# Altium PCB WCHA_PCB.PcbDoc
Units mm, origin at the board's own origin, x right, y up, seen from the top; angles counter-clockwise.
Board outline 169.67 x 124.71 mm, 2 copper layers (Top Layer, Bottom Layer); 50 components, 43 nets, 186 pads, 1 vias.
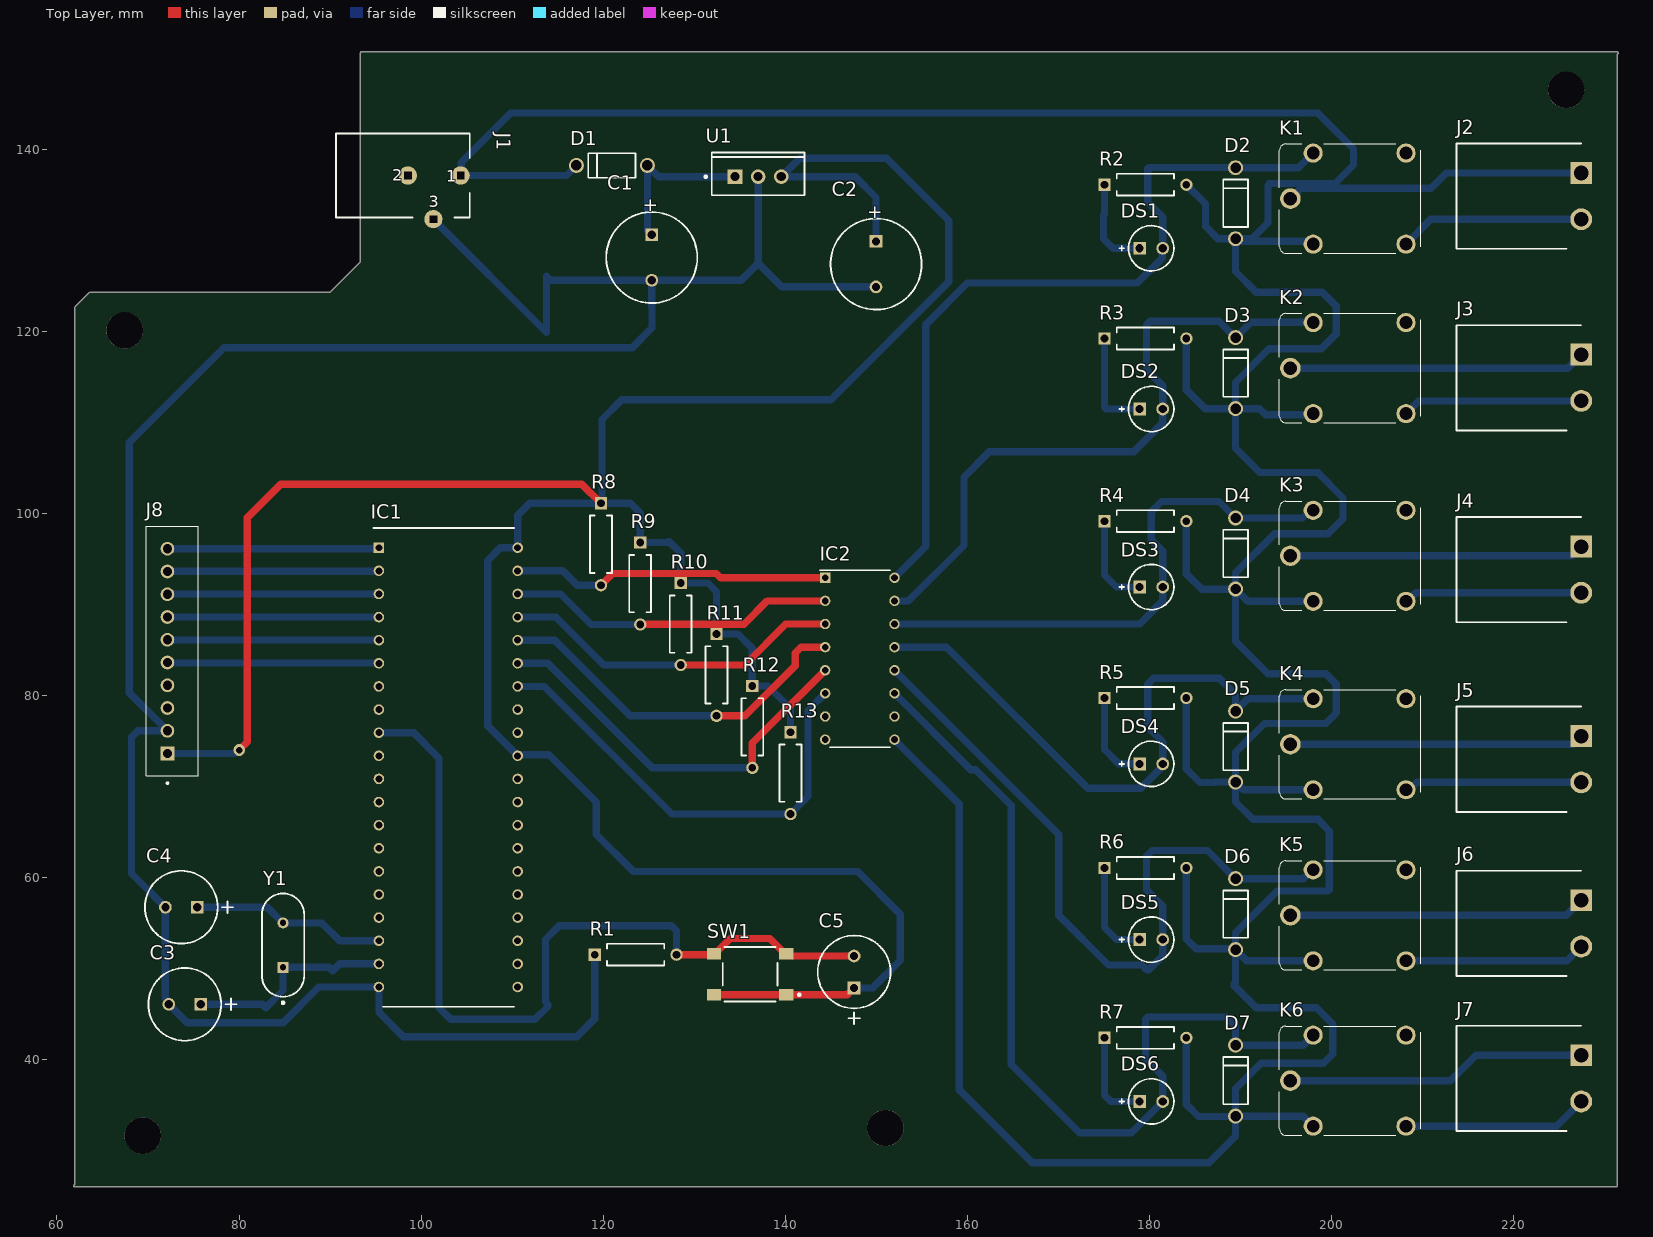
[diagram p0: Top Layer view]
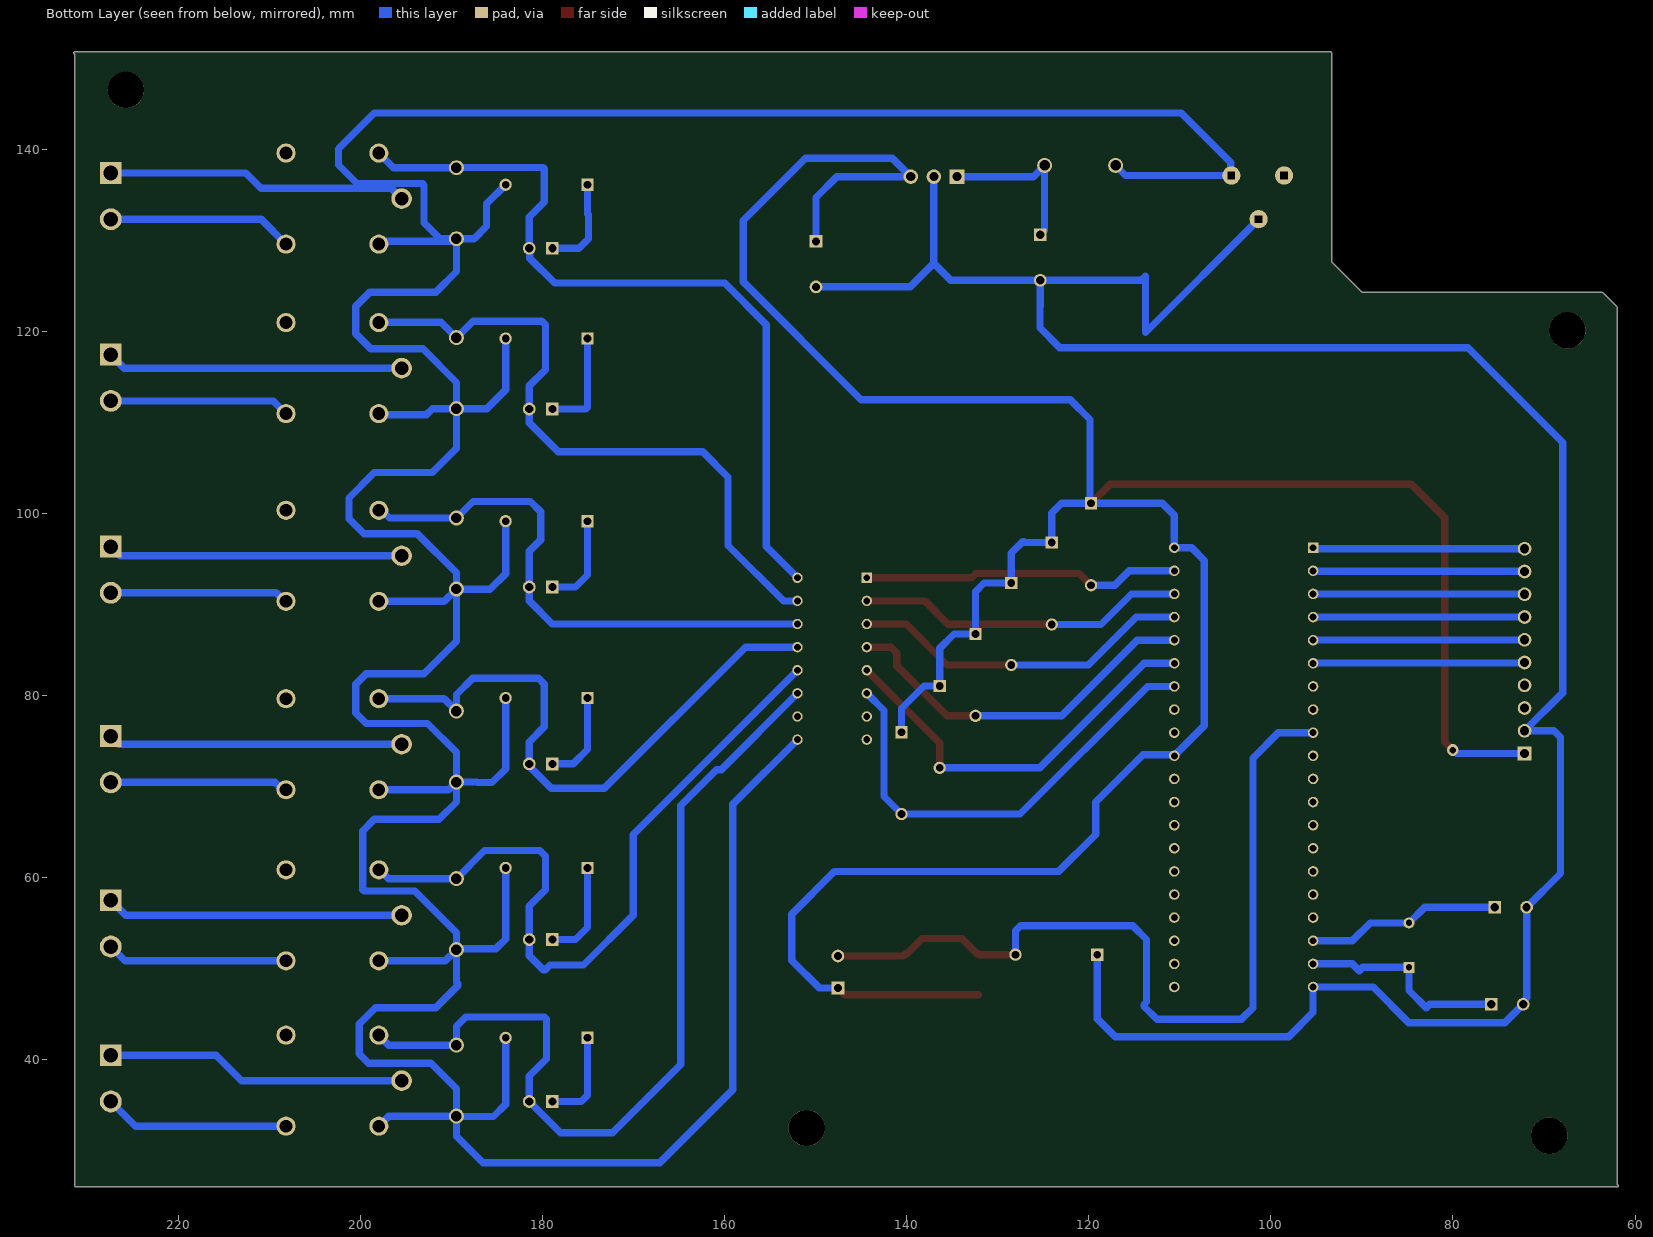
[diagram p1: Bottom Layer view, seen from below]

## Layer stack, top to bottom
Top Solder: solder mask 0.0102, Solder Resist, Dk 3.5
Top Layer: signal copper 0.0356
Dielectric 1: dielectric 0.32, FR-4, Dk 4.8
Bottom Layer: signal copper 0.0356
Bottom Solder: solder mask 0.0102, Solder Resist, Dk 3.5

## Board outline
61.976,26.289 61.976,122.682 62.013,122.772 63.537,124.296 63.627,124.333 89.99,124.333 93.345,127.688 93.345,150.622 cw(c93.472,150.622) 93.474,150.749 231.394,150.749 cw(c231.394,150.622) 231.521,150.622 cw(c231.394,150.622) 231.394,150.495 231.394,26.162 cw(c231.267,26.162) 231.267,26.035 61.976,26.035 cw(c61.976,26.162)

## Design rules (kind name [scope] priority, off if disabled: settings)
Clearance Clearance_1 [All] p1 off: gap=0.254 ignorepadtopadclearanceinfootprint=FALSE
Clearance [All] p2: gap=0.25 ignorepadtopadclearanceinfootprint=TRUE
PolygonConnect [All] p1: connectstyle=Relief reliefconductorwidth=0.254 reliefentries=4 polygonreliefangle="90 Angle" airgapwidth=0.254
RoutingVias [All] p1: holewidth=0.711 width=1.27 viastyle="Through Hole" minholewidth=0.711 minwidth=1.27 maxholewidth=0.711 maxwidth=1.27
SolderMaskExpansion [All] p1: expansion=0.102 istentingtop=FALSE
Width [All] p1: maxlimit=1.2 minlimit=0.254 preferedwidth=0.254 minimp=50.000000 maximp=50.000000 favimp=50.000000
30 further rules are at their usual default settings.

## Components (designator, comment, footprint, x,y, rotation, side; value= is the part's Value field where it differs from the comment)
C1 "ECA1EM102" CAPPR65-500-2000X1000X2200 125.349,128.143 r270 top value=100uF
C2 "ECA1EM102" CAPPR65-500-2000X1000X2200 149.987,127.421 r270 top value=100uF
C3 "ECA1HM101" CAPPR65-350-1150X800X1250 74.041,46.101 r180 top value=33pF
C4 "ECA1HM101" CAPPR65-350-1150X800X1250 73.66,56.769 r180 top value=33pF
C5 "ECA1HM101" CAPPR65-350-1150X800X1250 147.574,49.657 r90 top value=100µF
D1 "1N4007" FAIR-DO-41-2 120.967,138.259 r180 top
D2 "1N4007" FAIR-DO-41-2 189.484,134.112 r90 top
D3 "1N4007" FAIR-DO-41-2 189.484,115.443 r90 top
D4 "1N4007" FAIR-DO-41-2 189.484,95.631 r90 top
D5 "1N4007" FAIR-DO-41-2 189.484,74.422 r90 top
D6 "1N4007" FAIR-DO-41-2 189.484,56.007 r90 top
D7 "1N4007" FAIR-DO-41-2 189.484,37.719 r90 top
DS1 "LTL-1CHYE" LTST-LTL-1CHYE 180.213,129.159 r0 top
DS2 "LTL-1CHYE" LTST-LTL-1CHYE 180.213,111.506 r0 top
DS3 "LTL-1CHYE" LTST-LTL-1CHYE 180.213,91.948 r0 top
DS4 "LTL-1CHYE" LTST-LTL-1CHYE 180.213,72.517 r0 top
DS5 "LTL-1CHYE" LTST-LTL-1CHYE 180.213,53.213 r0 top
DS6 "LTL-1CHYE" LTST-LTL-1CHYE 180.213,35.433 r0 top
IC1 "AT89C51-12PC" DIP1525W56P254L5220H559Q40N 102.994,72.136 r0 top
IC2 "ULN2003A" DIP762W54P254L1918H445Q16N 148.209,84.074 r0 top
J1 "694106301002" 694106301002 98.552,137.16 r0 top
J2 "2EDGRC-5.08-02P-14-00A_H_" SHDRRA2W100P0X508_1X2_1156X1210X780P 227.457,137.432 r90 top
J3 "2EDGRC-5.08-02P-14-00A_H_" SHDRRA2W100P0X508_1X2_1156X1210X780P 227.457,117.475 r90 top
J4 "2EDGRC-5.08-02P-14-00A_H_" SHDRRA2W100P0X508_1X2_1156X1210X780P 227.457,96.393 r90 top
J5 "2EDGRC-5.08-02P-14-00A_H_" SHDRRA2W100P0X508_1X2_1156X1210X780P 227.457,75.565 r90 top
J6 "2EDGRC-5.08-02P-14-00A_H_" SHDRRA2W100P0X508_1X2_1156X1210X780P 227.457,57.531 r90 top
J7 "2EDGRC-5.08-02P-14-00A_H_" SHDRRA2W100P0X508_1X2_1156X1210X780P 227.457,40.513 r90 top
J8 "B10B-XH-A(LF)(SN)" JST_B10B-XH-A(LF)(SN) 72.661,84.903 r270 top
K1 "JJM1-12V" RELAY_JJM1-12V 202.057,134.62 r180 top
K2 "JJM1-12V" RELAY_JJM1-12V 202.057,115.998 r180 top
K3 "JJM1-12V" RELAY_JJM1-12V 202.057,95.377 r180 top
K4 "JJM1-12V" RELAY_JJM1-12V 202.057,74.676 r180 top
K5 "JJM1-12V" RELAY_JJM1-12V 202.057,55.88 r180 top
K6 "JJM1-12V" RELAY_JJM1-12V 202.057,37.719 r180 top
R1 "MFR-25FBF52-47K5" RESA60-630X240 123.571,51.562 r0 top value=8.2k
R2 "MFR-25FBF52-47K5" RESA60-630X240 179.578,136.144 r0 top value=8.2k
R3 "MFR-25FBF52-47K5" RESA60-630X240 179.578,119.253 r0 top value=8.2k
R4 "MFR-25FBF52-47K5" RESA60-630X240 179.578,99.187 r0 top value=8.2k
R5 "MFR-25FBF52-47K5" RESA60-630X240 179.578,79.756 r0 top value=8.2k
R6 "MFR-25FBF52-47K5" RESA60-630X240 179.578,61.087 r0 top value=8.2k
R7 "MFR-25FBF52-47K5" RESA60-630X240 179.578,42.418 r0 top value=8.2k
R8 "MFR-25FBF52-47K5" RESA60-630X240 119.761,96.647 r270 top value=1k
R9 "MFR-25FBF52-47K5" RESA60-630X240 124.079,92.329 r270 top value=1k
R10 "MFR-25FBF52-47K5" RESA60-630X240 128.524,87.884 r270 top value=1k
R11 "MFR-25FBF52-47K5" RESA60-630X240 132.461,82.296 r270 top value=1k
R12 "MFR-25FBF52-47K5" RESA60-630X240 136.398,76.581 r270 top value=1k
R13 "MFR-25FBF52-47K5" RESA60-630X240 140.589,71.501 r270 top value=1k
SW1 "PTS645SM43SMTR92LFS" FP-PTS645SM43SMTR92LFS-MFG 136.144,49.403 r180 top
U1 "LM7805CT" FAIR-TO-220-3 137.033,137.033 r90 top
Y1 "FOXSLF/160-20" FOX-FOXSLF160-20 84.836,52.605 r90 top

## Footprints (in the part's own frame and the unit in brackets; to place one, negate y for a bottom-side part, rotate by r counter-clockwise, add the part's x,y. Pads: shape width x height; smd on the part's side, far side on the other; paste and mask are expansions set on the pad)
694106301002 [mm]
  round 2 hole 0.8 square: 1(5.8,0) 2(0,0) 3(2.8,-4.8)
  silkscreen extent -7.9,-4.6 6.8,4.6, body extent -4.5,-5.35 5,9.14, height 11
CAPPR65-350-1150X800X1250 [mm] "THD, 2-Leads, Dia 8mm, Pin Spacing 3.5mm"
  rect 1.4x1.4 hole 0.9: 1(-1.75,0)
  round 1.4 hole 0.9: 2(1.75,0)
  silkscreen extent -5.71,-4 4,4, body extent -4,-4 3.95,4, height 12.5
CAPPR65-500-2000X1000X2200 [mm] "THD, 2-Leads, Dia 10mm, Pin Spacing 5mm"
  rect 1.4x1.4 hole 0.9: 1(-2.5,0)
  round 1.4 hole 0.9: 2(2.5,0)
  silkscreen extent -5,-5 5,5, body extent -5,-5 4.95,5, height 22
DIP762W54P254L1918H445Q16N [mm]
  rect 1.14x1.14 hole 0.74: 1(-3.81,8.89)
  round 1.14 hole 0.74: 2(-3.81,6.35) 3(-3.81,3.81) 4(-3.81,1.27) 5(-3.81,-1.27) 6(-3.81,-3.81) 7(-3.81,-6.35) 8(-3.81,-8.89) 9(3.81,-8.89) 10(3.81,-6.35) 11(3.81,-3.81) 12(3.81,-1.27) 13(3.81,1.27) 14(3.81,3.81) 15(3.81,6.35) 16(3.81,8.89)
  silkscreen extent -4.38,-9.72 3.3,9.72, body extent -3.95,-9.59 3.95,9.59, height 4.45
DIP1525W56P254L5220H559Q40N [mm]
  rect 1.159x1.159 hole 0.759: 1(-7.623,24.13)
  round 1.159 hole 0.759: 2(-7.623,21.59) 3(-7.623,19.05) 4(-7.623,16.51) 5(-7.623,13.97) 6(-7.623,11.43) 7(-7.623,8.89) 8(-7.623,6.35) 9(-7.623,3.81) 10(-7.623,1.27) 11(-7.623,-1.27) 12(-7.623,-3.81) 13(-7.623,-6.35) 14(-7.623,-8.89) 15(-7.623,-11.43) 16(-7.623,-13.97) 17(-7.623,-16.51) 18(-7.623,-19.05) 19(-7.623,-21.59) 20(-7.623,-24.13) 21(7.623,-24.13) 22(7.623,-21.59) 23(7.623,-19.05) 24(7.623,-16.51) 25(7.623,-13.97) 26(7.623,-11.43) 27(7.623,-8.89) 28(7.623,-6.35) 29(7.623,-3.81) 30(7.623,-1.27) 31(7.623,1.27) 32(7.623,3.81) 33(7.623,6.35) 34(7.623,8.89) 35(7.623,11.43) 36(7.623,13.97) 37(7.623,16.51) 38(7.623,19.05) 39(7.623,21.59) 40(7.623,24.13)
  silkscreen extent -8.2,-26.3 7.2,26.3, body extent -7.76,-26.1 7.76,26.1, height 5.59
FAIR-DO-41-2 [mm] "THD, 2-Leads, Body 5.2x2.72mm, Pin Spacing 7.8mm"
  round 1.65 hole 1.15: 1(-3.9,0) 2(3.9,0)
  silkscreen extent -2.6,-1.35 2.6,1.35, body extent -4.29,-1.17 4.29,1.17, height 2.35
FAIR-TO-220-3 [mm] "FM, 3-Leads, Body 10.2x4.7mm, Pitch 2.54mm"
  rect 1.6x1.6 hole 1: 1(0,2.54)
  round 1.6 hole 1: 2(0,0) 3(0,-2.54)
  silkscreen extent -2.04,-5.1 2.66,5.87, body extent -2.04,-5.1 2.66,5.1, height 18.95
FOX-FOXSLF160-20 [mm] "THD, 2-Leads, Body 11.35x4.65mm"
  rect 1.2x1.2 hole 0.7: 1(-2.44,0)
  round 1.2 hole 0.7: 2(2.44,0)
  silkscreen extent -6.45,-2.32 5.67,2.32, body extent -5.68,-2.33 5.68,2.33, height 3.6
FP-PTS645SM43SMTR92LFS-MFG [mm]
  rect 1.55x1.3 smd paste+0 mask+0: 1(-3.975,2.25) 2(3.975,2.25) 3(-3.975,-2.25) 4(3.975,-2.25)
  silkscreen extent -5.53,-3 3,3, body extent -4.85,-3.1 4.85,3.1, height 0.25
JST_B10B-XH-A(LF)(SN) [mm]
  rect 1.508x1.508 hole 1: 1(11.25,-0.525)
  round 1.508 hole 1: 2(8.75,-0.525) 3(6.25,-0.525) 4(3.75,-0.525) 5(1.25,-0.525) 6(-1.25,-0.525) 7(-3.75,-0.525) 8(-6.25,-0.525) 9(-8.75,-0.525) 10(-11.25,-0.525)
  silkscreen extent -13.7,-2.88 14.6,2.88, body extent -13.7,-2.88 13.7,2.88, height 7
LTST-LTL-1CHYE [mm] "THD, 2-Leads, Dia 3.8mm, Pitch 2.54mm"
  rect 1.4x1.4 hole 0.9: 1(-1.27,0)
  round 1.4 hole 0.9: 2(1.27,0)
  silkscreen extent -3.49,-2.49 2.49,2.49, body extent -1.9,-1.9 1.9,1.9, height 6.5
RELAY_JJM1-12V [mm]
  round 2.1 hole 1.4: 1(4.05,5) 2(4.05,-5) NC(-6.15,-5) NO(-6.15,5)
  round 2.25 hole 1.5: C(6.55,0)
  silkscreen extent -7.75,-6 7.75,6, body extent -7.75,-6 7.75,6, height 13.9
RESA60-630X240 [mm] "Axial Resistor, 2-Leads, Dia 2.4mm, Body Length 6.3mm"
  rect 1.35x1.35 hole 0.85: 1(-4.5,0)
  round 1.35 hole 0.85: 2(4.5,0)
  silkscreen extent -3.15,-1.2 3.15,1.2, body extent -4.77,-1.19 4.77,1.2, height 2.4
SHDRRA2W100P0X508_1X2_1156X1210X780P [mm]
  rect 2.4x2.4 / inner round 2.4 / far side rect 2.4x2.4 hole 1.6: 1(0,0)
  round 2.4 hole 1.6: 2(-5.08,0)
  silkscreen extent -8.32,0 3.24,13.7

## Part data
C1 C2: library part CMP-001-00023-8, "Aluminum Electrolytic Capacitor, 1000 uF, +/- 20%, 25 V, -40 to 85 degC, 2-Pin THD, RoHS, Bulk", Capacitor Type=Electrolytic, Case/Package=Radial, Manufacturer=Panasonic, Max Operating Temperature=85°C, Min Operating Temperature=-40°C, Package Description="2-Pin Radial Lead, Dia 10 mm, Height 22 mm", Package Quantity=200, Package Reference=CAPPR65-500-2000X1000X2200, Ripple Current=850mA, Tolerance=20%, Voltage Rating=25V, Datasheet URL=https://industrial.panasonic.com/cdbs/www-data/pdf/RDF0000/ABA0000C1218.pdf, Datasheet Version="Rev. 05, 10/2016", Diameter=10mm, Lead Pitch=5mm, Manufacturer URL=http://www.panasonic.com/, Mounting Technology=TH, Packaging=Bulk, RoHS Compliant=True
C3 C4 C5: library part CMP-001-00026-7, "Aluminum Electrolytic Capacitor, 100 uF, +/- 20%, 50 V, -40 to 85 degC, 2-Pin THD, RoHS, Bulk", Capacitor Type=Electrolytic, Case/Package=Radial, Manufacturer=Panasonic, Max Operating Temperature=85°C, Min Operating Temperature=-40°C, Package Description="2-Pin Radial Lead, Dia 8 mm, Height 12.5 mm", Package Quantity=200, Package Reference=CAPPR65-350-1150X800X1250, Ripple Current=250mA, Tolerance=20%, Voltage Rating=50V, Datasheet URL=https://industrial.panasonic.com/cdbs/www-data/pdf/RDF0000/ABA0000C1218.pdf, Datasheet Version="Rev. 05, 10/2016", Diameter=8mm, Lead Pitch=3.5mm, Manufacturer URL=http://www.panasonic.com/, Mounting Technology=TH, Packaging=Bulk, Pins=2, Ripple Current (AC)=250mA, RoHS Compliant=True
D1 D2 D3 D4 D5 D6 D7: library part CMP-004-00007-2, "General Purpose Rectifier, 1.1 V, 1.0 A, -55 to 175 degC, 2-Pin DO-41, RoHS, Tape and Reel", Case/Package=DO-41-2, Forward Current=1A, Forward Voltage=1.1V, Manufacturer=Fairchild, Max Operating Temperature=175°C, Max Surge Current=30A, Min Operating Temperature=-55°C, Package Description="2-Pin Axial Lead, Dia 2.375 mm, Body Length 4.63 mm", Package Quantity=5000, Package Version="Rev. 2, 09/2008", Peak Reverse Current=5uA, Datasheet URL=https://www.fairchildsemi.com/datasheets/1N/1N4007.pdf, Datasheet Version="Rev. 1.1.0, 11/2014", Elements=1, Manufacturer URL=https://www.fairchildsemi.com/, Mounting Technology=TH, Package Reference=DO-41-2, Package URL=http://www.fairchildsemi.com/dwg/DO/DO41A.pdf, Packaging=TapeandReel, Pins=2, RoHS Compliant=True
DS1 DS2 DS3 DS4 DS5 DS6: library part CMP-007-00020-2, "LED Uni-Color Yellow, 60 mW, 20 mA, -55 to 100 degC, 2-Pin THD, RoHS, Bulk", Case/Package=Radial, Colour=Yellow, Forward Current=20mA, Forward Voltage=2.1V, Manufacturer=Lite-On, Max Operating Temperature=100°C, Min Operating Temperature=-55°C, Package Description="2-Pin Through Hole Device, Dia 3.8 mm, Pitch 2.54 mm", Package Quantity=1000, Datasheet URL=https://datasheet.ciiva.com/4269/s-110-ltl-1chye-4269126.pdf, Datasheet Version="Rev. B, 07/2013", Illumination Colour=Yellow, Lens Style=Dome, Luminous Intensity=40mcd, Manufacturer URL=http://www.us.liteon.com/, Mounting Technology=TH, Nominal Vf=2.1V, Package Reference=LTL-1CHYE, Packaging=Bulk, Pins=2, RoHS Compliant=True, Viewing Angle=45degrees
IC1: "Integrated Circuit", Manufacturer_Name=Microchip, Mouser Part Number=556-AT89C51-12PC, Datasheet Link=http://ww1.microchip.com/downloads/en/devicedoc/doc0265.pdf, Height=5.59mm, Manufacturer_Part_Number=AT89C51-12PC, Mouser Price/Stock=https://www.mouser.co.uk/ProductDetail/Microchip-Technology/AT89C51-12PC?qs=fKsNvYl5pt%252B5M7MsETpzQw%3D%3D
IC2: "Integrated Circuit", Manufacturer_Name=UMW, Datasheet Link=https://media.digikey.com/pdf/Data%20Sheets/UTD%20Semi%20PDFs/ULN2003.pdf, Height=4.45mm, Manufacturer_Part_Number=ULN2003A
J1: "<b> WR-DC DC Power Jack Right Angled (6.4) <br> <br> KIND PROPERTIES  <br><br> </b>Quality Class 5 000 Mating cycles  <br>Type Right Angled  <br> <br> <b>MATERIAL PROPERTIES  <br><br> </b>Insulator Material PA66  <br>Insulator Flammability Rating UL94 V-0  <br>Color Black  <br>Contact Material Copper Alloy  <br>Contact Type Stamped  <br>Center Pin Plating Gold  <br>Center Pin Terminal Plating Tin  <br>Tip Spring Material Tin  <br>Shunt Terminal Plating Tin  <br><br> <b>GENERAL INFORMATION  <br><br> </b>Operating Temperature -40 up to +85 Â°C  <br>Compliance RoHS  <br> <br> <b>ELECTRICAL PROPERTIES  <br><br> </b>IR 1 5 A  <br>Working Voltage 30 V (AC)  <br>Withstanding Voltage 500 V (AC)  <br>Contact Resistance 50 mÎ©  <br>RISO 100 MÎ©  <br> <br> <b>PACKAGING PROPERTIES  <br><br> </b>Packaging Bag  <br> <br> <br><a href=\"https://www.we-online.com/catalog/media/o59009v209%20Family_WR-DC_DC_Power_Jack_Right_Angled_THT_69410x301002.jpg\" title=\"Enlarge picture\"> <img src=\"https://www.we-online.com/catalog/media/o59009v209%20Family_WR-DC_DC_Power_Jack_Right_Angled_THT_69410x301002.jpg\" width=\"320\"></a><p> Details see: <a href=\"https://www.we-online.com/catalog/en/DC_RIGHT_ANGLED_6_4_69410X301002\">https://www.we-online.com/catalog/en/DC_RIGHT_ANGLED_6_4_69410X301002</a><p> </b>Updated by Ella Wu  2021-09-30<br> </b>2021(C) Wurth Elektronik", Package=None, Availability=Unavailable, MF="{'manufacturer': u'Wurth Elektronik'}", MP=694106301002, Price=None
J2 J3 J4 J5 J6 J7: library part CMP-002-00074-1, "R/A SHrouded Header", Manufacturer_Name=Degson, Manufacturer_Part_Number=2EDGRC-5.08-02P-14-00A(H), Design Item ID=2EDGRC-5.08-02P-14-00A_H_, Geometry.Height=7.8mm, Source=2EDGRC-5.08-02P-14-00A_H_.SchLib
J8: Package=None, Availability=Unavailable, MF="{'manufacturer': u'JST Sales'}", MP=B10B-XH-A(LF)(SN), Price=None
K1 K2 K3 K4 K5 K6: "Electromechanical Relay 12VDC 225Ohm 20(NO)/10(NC)A SPDT (( 15.5mm 12mm 13.9mm)) THT Automotive Relay", Package=None, Availability=Unavailable, MF="{'manufacturer': u'Panasonic Electric'}", MP=JJM1-12V, Price=None
R1 R2 R3 R4 R5 R6 R7 R8 R9 R10 R11 R12 R13: library part CMP-009-00057-4, "Axial Resistor, 47.5 KOhm, +/- 1%, 0.25 W, -55 to 155 degC, 2-Pin THD, RoHS, Bulk", Case/Package=Axial, Manufacturer=Yageo, Max Operating Temperature=155°C, Min Operating Temperature=-55°C, Package Description="2-Pin Axial Lead, Dia 2.4 mm, Body Length 6.3 mm", Package Quantity=200, Package Reference=MFR-25, Power=250mW, Tolerance=1%, Voltage Rating=250V, Datasheet URL=http://www.yageo.com/documents/recent/Yageo%20LR_MFR_2013.pdf, Datasheet Version=Apr-13, Manufacturer URL=http://www.yageo.com/, Mounting Technology=TH, Packaging=Bulk, RoHS Compliant=True
SW1: library part CMP-2000-05160-2, "SWITCH TACTILE SPST-NO 0.05A 12V", Case/Package=SMD/SMT, Color=Black, Contact Resistance=100mR, Current Rating=50mA, Max Operating Temperature=60°C, Max Voltage Rating (DC)=12V, Min Operating Temperature=-20°C, Operating Force=160gf, Package Quantity=1, Actuator Length=0.85mm, Actuator Material=Nylon, Actuator Type=Standard, Contact Material=Silver, Contact Plating=Silver, Depth=9mm, Illumination Type=Non-Illuminated, Lead Free="Lead Free", Length=6mm, Max Current Rating=50mA, Mechanical Life=100000Cycles, Mount="Surface Mount", Orientation=Straight, Packaging="Tape and Reel", REACH SVHC="No SVHC", Switch Function=Off-Mom, Termination="Gull Wing", Throw Configuration=SPST, Voltage Rating (DC)=12V
U1: library part CMP-2000-04938-1, "Positive Voltage Regulator, 5 V, 1 A, -40 to 125 degC, 3-Pin TO-220, RoHS, Tube", Manufacturer=FairchildSemiconductor, Maximum Input Voltage=35V, Maximum Output Current=2.2(Typ)A, Maximum Quiescent Current=8mA, Operating Temperature=-40to125degC, Output Voltage=5V, Package=3TO-220AB, Package Description="3-Pin Through Hole Device, Body 10 x 4.5 mm, Pitch 2.54 mm", Package Reference=TO-220, Typical Dropout Voltage @ Current=2@1AV, Accuracy=±4%, Category=LinearRegulator, Datasheet URL=https://datasheet.ciiva.com/26904/lm7805ct-26904988.pdf, Datasheet Version=Aug-12, Line Regulation=100mV, Load Regulation=100mV, Manufacturer URL=https://www.fairchildsemi.com/, Mounting=ThroughHole, Number of Outputs=1, Output Type=Fixed, Package URL=https://www.fairchildsemi.com/package-drawings/TO/TO220B03.pdf, Packaging=Rail/Tube, Polarity=Positive, Rad Hard=No, Type=Linear
Y1: library part CMP-003-00027-2, "Resistance Weld Thru-Hole Crystal, 16 MHz, +/- 30 ppm, 20 pF, -20 to 70 degC, 2-Pin THD, RoHS, Bulk", Case/Package=FOXSLF160-20, Frequency=16MHz, Frequency Tolerance=30ppm, Load Capacitance=20pF, Manufacturer="FOX Electronics", Max Operating Temperature=70°C, Min Operating Temperature=-20°C, Package Description="2-Pin Through Hole Device, Body 11.35 x 4.65 mm", Package Quantity=100, Resistance=40Ohm, Tolerance=50ppm, Datasheet URL=http://www.foxonline.com/pdfs/hc49slf.pdf, Datasheet Version=Mar-15, ESR=40, Manufacturer URL=http://www.foxonline.com/, Mounting Technology=TH, Package Reference=FOXSLF160-20, Packaging=Bulk, Pins=2, RoHS Compliant=True

## Free pads (board coordinates)
  round 4 hole 4: 2(67.437,120.142) 3(69.426,31.669) 4(151.003,32.512) 5(225.806,146.558)

## Via types
v1: diameter 1.27, hole 0.711, Top Layer to Bottom Layer, 1 vias

## Nets (pads, with @x,y where several pads share a name; then routed paths per layer and width w, separated by ;. In a path a pad name is that pad's centre, name@x,y a point inside that pad or via, vN(x,y) a via of type N, cw(c..) or ccw(c..) an arc to the next point about the centre after c; other vN are vias at no path point)
1: D1.2 D2.1 D3.1 D4.1 D5.1 D6.1 D7.1 IC2.9 J1.1 K1.1 K2.1 K3.1 K4.1 K5.1 K6.1 R2.2 R3.2 R4.2 R5.2 R6.2 R7.2 | length 522.8
  Bottom Layer w0.8: D1.2 115.968,137.16 J1.1 104.43,137.238 104.43,138.593 109.855,144.018 198.501,144.018 202.438,140.081 202.438,138.303 200.406,136.271 193.189,136.271 193.04,136.122 193.04,131.953 191.299,130.212 D2.1 ; IC2.9 159.131,68.072 159.131,36.703 167.132,28.702 186.563,28.702 189.484,31.623 D7.1 ; R7.2 184.078,35.124 185.42,33.782 189.447,33.782 D7.1 ; R6.2 184.078,53.285 185.166,52.197 189.394,52.197 D6.1 ; R5.2 184.078,71.954 185.569,70.463 187.175,70.463 187.233,70.522 D5.1 ; R4.2 184.078,93.417 185.801,91.694 189.447,91.694 D4.1 ; R3.2 184.078,113.61 186.145,111.543 D3.1 ; R2.2 186.182,134.04 186.182,131.572 187.542,130.212 D2.1 ; K6.1 196.907,33.819 D7.1 ; K5.1 190.711,50.88 D6.1 ; K4.1 190.344,69.676 189.498,70.522 D5.1 ; K3.1 190.838,90.377 D4.1 ; K2.1 197.88,110.871 192.786,110.871 192.114,111.543 D3.1 ; K1.1 197.682,129.945 189.751,129.945 D2.1 ; D7.1 189.484,36.83 192.278,39.624 199.136,39.624 200.152,40.64 200.152,43.942 198.374,45.72 191.77,45.72 189.335,48.155 189.335,48.365 189.484,48.514 D6.1 ; D6.1 189.484,53.975 194.056,58.547 199.622,58.547 199.771,58.696 199.771,65.151 198.501,66.421 191.389,66.421 189.484,68.326 D5.1 ; D5.1 189.484,73.787 192.659,76.962 199.39,76.962 200.533,78.105 200.533,81.28 199.39,82.423 193.04,82.423 189.484,85.979 D4.1 ; D4.1 189.484,93.516 193.78,97.812 193.802,97.79 199.644,97.79 201.295,99.441 201.295,101.727 198.501,104.521 192.151,104.521 189.484,107.188 D3.1 ; D3.1 189.484,114.427 193.167,118.11 198.882,118.11 200.533,119.761 200.533,122.809 199.009,124.333 191.77,124.333 189.484,126.619 D2.1
+5V: C2.1 C5.1 IC1.31 IC1.40 J8.1 R8.1 R9.1 R10.1 R11.1 R12.1 R13.1 SW1.1 SW1.2 U1.3 | length 334.2
  Top Layer w0.8: v1(80.01,74.041) 80.899,74.93 80.899,99.568 84.582,103.251 117.657,103.251 R8.1 ; SW1.2 SW1.1 146.82,47.153 C5.1
  Bottom Layer w0.8: J8.1 79.622,73.653 v1(80.01,74.041) ; R13.1 140.589,78.613 138.121,81.081 R12.1 136.398,85.217 134.819,86.796 R11.1 132.461,91.44 131.517,92.384 R10.1 128.524,95.68 127.281,96.923 127.149,96.923 127.055,96.829 R9.1 124.079,100.076 123.008,101.147 R8.1 ; C5.1 149.634,47.907 152.676,50.949 152.676,51.159 152.654,51.181 152.654,56.007 147.955,60.706 123.317,60.706 119.253,64.77 119.253,68.326 114.046,73.533 110.744,73.533 IC1.31 107.315,76.708 107.315,94.869 108.712,96.266 IC1.40 110.617,99.822 111.942,101.147 R8.1 ; C2.1 149.987,134.747 147.701,137.033 U1.3 141.605,139.065 151.13,139.065 157.988,132.207 157.988,125.476 145.034,112.522 122.047,112.522 119.888,110.363 119.888,101.274 R8.1
A: IC1.39 IC2.1 R8.2 | length 35.2
  Top Layer w0.8: R8.2 121.054,93.44 132.415,93.44 132.891,92.964 IC2.1
  Bottom Layer w0.8: IC1.39 115.57,93.726 117.149,92.147 R8.2
B: IC1.38 IC2.2 R9.2 | length 36.2
  Top Layer w0.8: R9.2 124.102,87.852 135.477,87.852 138.049,90.424 IC2.2
  Bottom Layer w0.8: IC1.38 115.316,91.186 118.673,87.829 R9.2
C: IC1.37 IC2.3 R10.2 | length 37.8
  Top Layer w0.8: R10.2 135.581,83.384 140.081,87.884 IC2.3
  Bottom Layer w0.8: IC1.37 114.808,88.646 120.07,83.384 R10.2
C1: J2.1 K1.C | length 33.1
  Bottom Layer w0.8: K1.C 196.65,135.763 210.953,135.763 212.621,137.432 J2.1
C2: J3.1 K2.C | length 32.6
  Bottom Layer w0.8: K2.C 225.98,115.998 J3.1
C3: J4.1 K3.C | length 32.4
  Bottom Layer w0.8: K3.C 226.441,95.377 J4.1
C4: J5.1 K4.C | length 32.3
  Bottom Layer w0.8: K4.C 226.568,74.676 J5.1
C5: J6.1 K5.C | length 32.6
  Bottom Layer w0.8: K5.C 225.806,55.88 J6.1
C6: J7.1 K6.C | length 33.1
  Bottom Layer w0.8: K6.C 213.106,37.719 215.9,40.513 J7.1
D: IC1.36 IC2.4 R11.2 | length 41.2
  Top Layer w0.8: R11.2 135.581,77.796 141.097,83.312 141.097,84.709 141.732,85.344 IC2.4
  Bottom Layer w0.8: IC1.36 114.681,86.106 122.991,77.796 R11.2
E: IC1.35 IC2.5 R12.2 | length 44.6
  Top Layer w0.8: R12.2 136.398,74.803 IC2.5
  Bottom Layer w0.8: IC1.35 113.919,83.566 125.404,72.081 R12.2
F: IC1.34 IC2.6 R13.2 | length 50.6
  Bottom Layer w0.8: IC1.34 113.538,81.026 127.563,67.001 R13.2 142.514,68.926 142.514,78.379 IC2.6
GND: C1.2 C2.2 C3.2 C4.2 IC1.20 J1.3 J8.2 R1.1 U1.2 | length 269.1
  Bottom Layer w0.8: J1.3 113.792,119.92 113.792,126.112 114.261,125.643 C1.2 ; R1.1 119.071,44.522 117.094,42.545 98.044,42.545 95.371,45.218 IC1.20 88.773,48.006 84.853,44.086 74.306,44.086 C3.2 72.291,46.411 71.91,46.792 C4.2 68.199,60.48 68.199,75.438 68.914,76.153 J8.2 67.945,80.344 67.945,107.823 78.359,118.237 123.19,118.237 125.371,120.418 125.371,122.755 125.349,122.777 C1.2 ; U1.2 137.033,127.508 ; C2.2 139.62,124.921 137.033,127.508 ; C1.2 135.168,125.643 137.033,127.508
Load_1: D2.2 DS1.2 IC2.16 K1.2 | length 87.7
  Bottom Layer w0.8: IC2.16 155.448,96.393 155.448,120.777 160.02,125.349 178.689,125.349 181.418,128.078 181.418,129.094 DS1.2 181.483,132.588 179.81,134.261 179.81,134.471 179.832,134.493 179.832,137.9 179.981,138.049 189.447,138.049 D2.2 196.399,138.012 K1.2
Load_2: D3.2 DS2.2 IC2.15 K2.2 | length 73.4
  Bottom Layer w0.8: IC2.15 153.543,90.424 159.639,96.52 159.639,104.013 162.433,106.807 178.308,106.807 181.483,109.982 DS2.2 181.483,114.046 179.705,115.824 179.705,120.777 180.086,121.158 187.669,121.158 D3.2 191.172,121.031 197.974,121.031 K2.2
Load_3: D4.2 DS3.2 IC2.14 K3.2 | length 60.2
  Bottom Layer w0.8: IC2.14 178.943,87.884 181.483,90.424 DS3.2 181.483,95.885 180.213,97.155 180.213,100.203 181.356,101.346 187.669,101.346 D4.2 196.829,99.531 197.675,100.377 K3.2
Load_4: D5.2 DS4.2 IC2.13 K4.2 | length 68.1
  Bottom Layer w0.8: IC2.13 157.734,85.344 173.228,69.85 179.07,69.85 181.483,72.263 DS4.2 181.483,74.93 179.832,76.581 179.832,81.28 180.467,81.915 187.706,81.915 189.484,80.137 D5.2 190.838,79.676 K4.2
Load_5: D6.2 DS5.2 IC2.12 K5.2 | length 80.9
  Bottom Layer w0.8: IC2.12 170.053,64.77 170.053,55.88 175.514,50.419 179.197,50.419 179.727,49.889 179.937,49.889 181.483,51.435 DS5.2 181.483,56.896 179.705,58.674 179.705,62.357 180.34,62.992 186.399,62.992 D6.2 196.956,59.907 197.929,60.88 K5.2
Load_6: D7.2 DS6.2 IC2.11 K6.2 | length 98.8
  Bottom Layer w0.8: IC2.11 160.401,71.882 160.909,71.882 164.846,67.945 164.846,39.497 172.339,32.004 178.054,32.004 DS6.2 181.483,38.227 179.578,40.132 179.578,44.45 179.832,44.704 188.468,44.704 189.484,43.688 D7.2 196.907,41.619 K6.2
N1: J2.2 K1.NO | length 20.4
  Bottom Layer w0.8: K1.NO 210.939,132.352 J2.2
N2: J3.2 K2.NO | length 19.8
  Bottom Layer w0.8: K2.NO 209.604,112.395 J3.2
N3: J4.2 K3.NO | length 19.6
  Bottom Layer w0.8: K3.NO 208.359,90.377 209.295,91.313 J4.2
N4: J5.2 K4.NO | length 19.6
  Bottom Layer w0.8: K4.NO 208.613,69.676 209.422,70.485 J5.2
N5: J6.2 K5.NO | length 19.9
  Bottom Layer w0.8: K5.NO 225.886,50.88 J6.2
N6: J7.2 K6.NO | length 20.4
  Bottom Layer w0.8: K6.NO 224.743,32.719 J7.2
NetC1_1: C1.1 D1.1 U1.1 | length 18
  Bottom Layer w0.8: C1.1 124.867,131.125 D1.1 126.093,137.033 U1.1
NetDS1_1: DS1.1 R2.1 | length 10.4
  Bottom Layer w0.8: R2.1 175.078,132.943 174.984,132.849 174.984,130.197 176.022,129.159 DS1.1
NetDS2_1: DS2.1 R3.1 | length 11.5
  Bottom Layer w0.8: R3.1 175.078,111.688 175.26,111.506 DS2.1
NetDS3_1: DS3.1 R4.1 | length 10.3
  Bottom Layer w0.8: R4.1 175.078,93.273 176.403,91.948 DS3.1
NetDS4_1: DS4.1 R5.1 | length 10.2
  Bottom Layer w0.8: R5.1 175.078,74.096 176.657,72.517 DS4.1
NetDS5_1: DS5.1 R6.1 | length 11
  Bottom Layer w0.8: R6.1 175.078,54.538 176.403,53.213 DS5.1
NetDS6_1: DS6.1 R7.1 | length 10.4
  Bottom Layer w0.8: R7.1 175.078,36.123 175.768,35.433 DS6.1
Reset: C5.2 IC1.9 R1.2 SW1.3 SW1.4 | length 94.7
  Top Layer w0.8: R1.2 132.078,51.562 SW1.4 132.294,51.653 133.981,53.34 138.307,53.34 139.994,51.653 SW1.3 140.365,51.407 C5.2
  Bottom Layer w0.8: IC1.9 99.187,75.946 101.981,73.152 101.981,45.72 103.251,44.45 112.522,44.45 113.941,45.869 113.941,46.079 113.665,46.355 113.665,53.213 115.189,54.737 127.508,54.737 128.071,54.174 R1.2 R1.2@128.016,51.617
S1: IC1.1 J8.10 | length 23.3
  Bottom Layer w0.8: J8.10 95.258,96.153 IC1.1
S2: IC1.2 J8.9 | length 23.3
  Bottom Layer w0.8: J8.9 72.172,93.69 95.335,93.69 IC1.2
S3: IC1.3 J8.8 | length 23.2
  Bottom Layer w0.8: J8.8 72.152,91.17 95.355,91.17 IC1.3
S4: IC1.4 J8.7 | length 23.2
  Bottom Layer w0.8: J8.7 72.14,88.65 95.368,88.65 IC1.4
S5: IC1.5 J8.6 | length 23.3
  Bottom Layer w0.8: J8.6 72.16,86.13 95.348,86.13 IC1.5
S6: IC1.6 J8.5 | length 23.3
  Bottom Layer w0.8: J8.5 72.18,83.61 95.328,83.61 IC1.6
XT1: C3.1 IC1.19 Y1.1 | length 23.5
  Bottom Layer w0.8: C3.1 82.55,46.101 82.931,45.72 84.836,47.625 Y1.1 89.916,50.165 90.297,49.784 91.059,50.546 IC1.19
XT2: C4.1 IC1.18 Y1.2 | length 21.5
  Bottom Layer w0.8: C4.1 83.112,56.769 Y1.2 89.1,55.045 91.059,53.086 IC1.18
pads on no net: IC1.7 IC1.8 IC1.10 IC1.11 IC1.12 IC1.13 IC1.14 IC1.15 IC1.16 IC1.17 IC1.21 IC1.22 IC1.23 IC1.24 IC1.25 IC1.26 IC1.27 IC1.28 IC1.29 IC1.30 IC1.32 IC1.33 IC2.7 IC2.8 IC2.10 J1.2 J8.3 J8.4 K1.NC K2.NC K3.NC K4.NC K5.NC K6.NC

## Silkscreen, mask and mechanical layers (free items; w line width, h text height)
Mechanical 1:
  lines w0.254: 61.976,26.162 62.103,26.289 62.103,122.682 63.627,124.206 90.043,124.206 93.472,127.635 93.472,150.622 231.394,150.622 231.267,150.495 231.267,26.162 61.976,26.162
  text "Wireless Control of Home Applainces 8CH V2" at 80.772,30.48 h2.5

## Text inside footprints (layer, text, board x,y; h text height)
C1: Top Overlay "+" at 124.599,134.693 h1.5 r270
C2: Top Overlay "+" at 149.237,133.971 h1.5 r270
J1: Top Overlay "3" at 100.852,133.66 h1.27; Top Overlay "1" at 102.752,136.46 h1.27; Top Overlay "2" at 96.852,136.56 h1.27; Mechanical 1 "PCB Cutout Area" at 104.452,137.16 h0.25; Mechanical 1 "PCB Cutout Area" at 98.652,137.16 h0.25; Mechanical 1 "PCB Cutout Area" at 101.452,132.16 h0.25